# EAGLE board Parallel CS Prototype multiple sources (EAGLE 7.2.0)
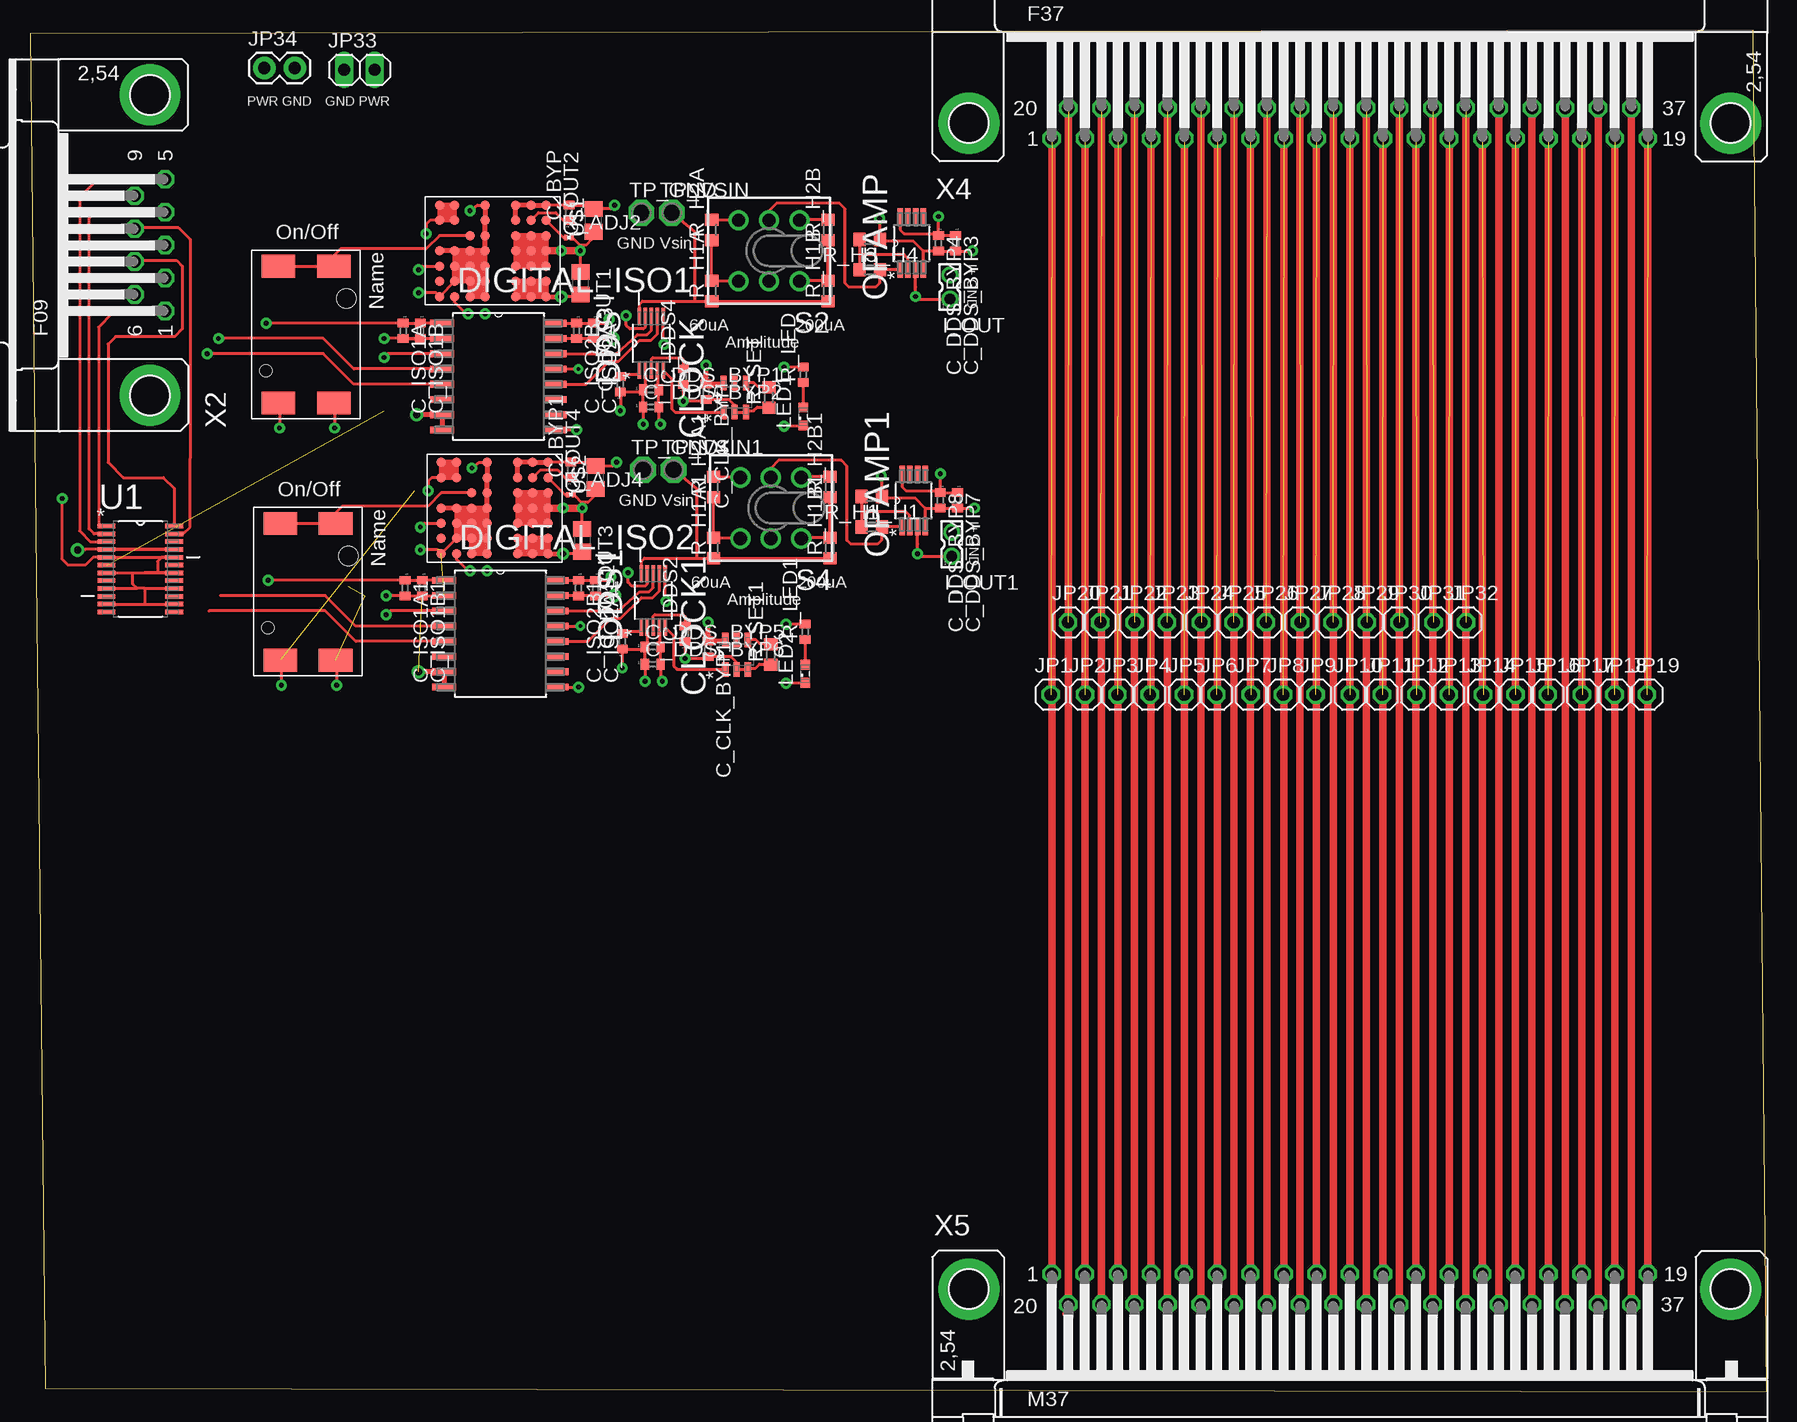
[diagram p0: board, top side]
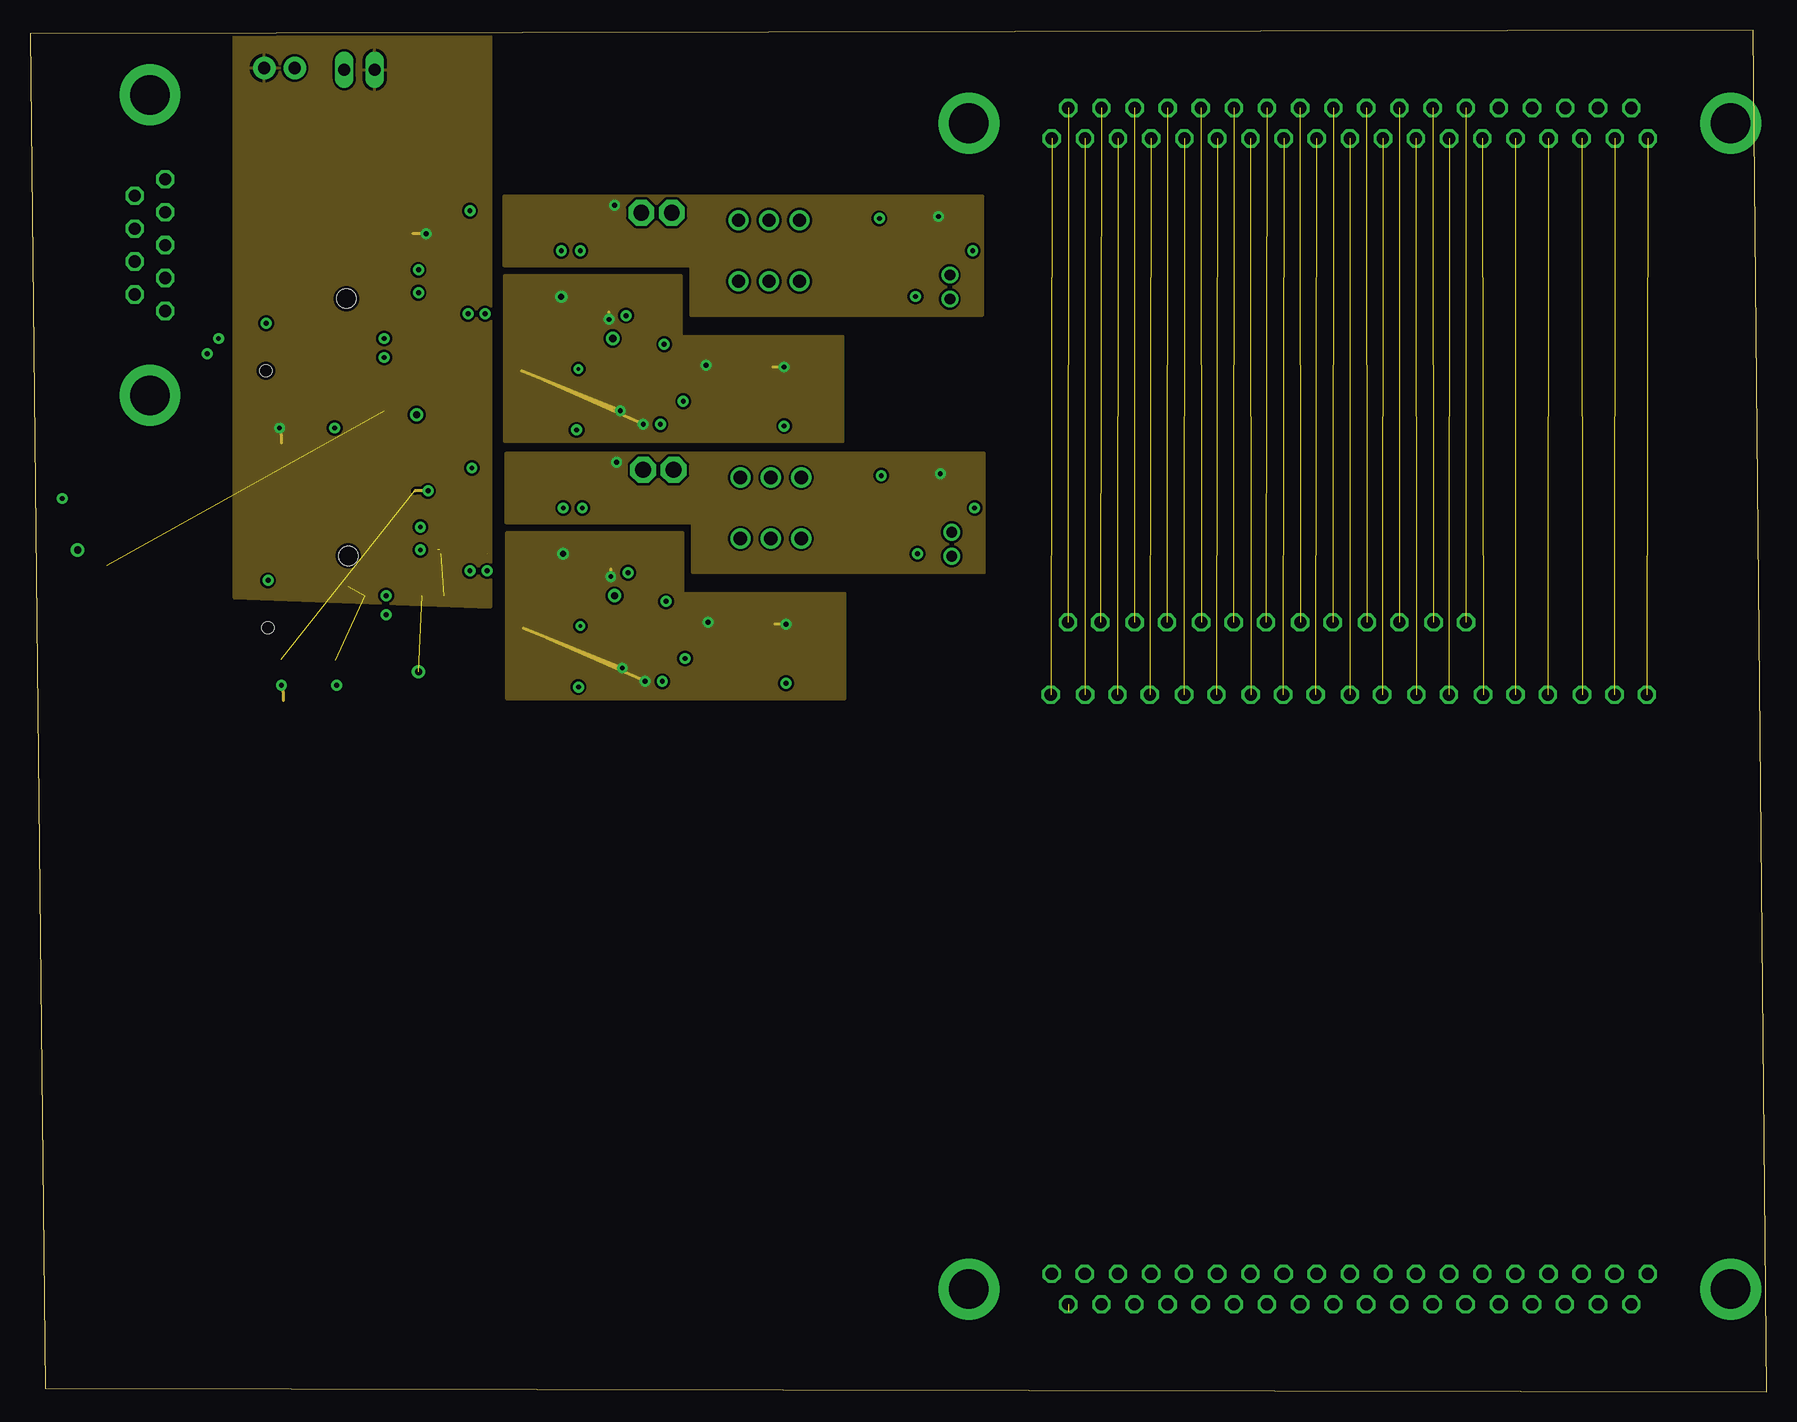
[diagram p1: board, inner layer Vdd]
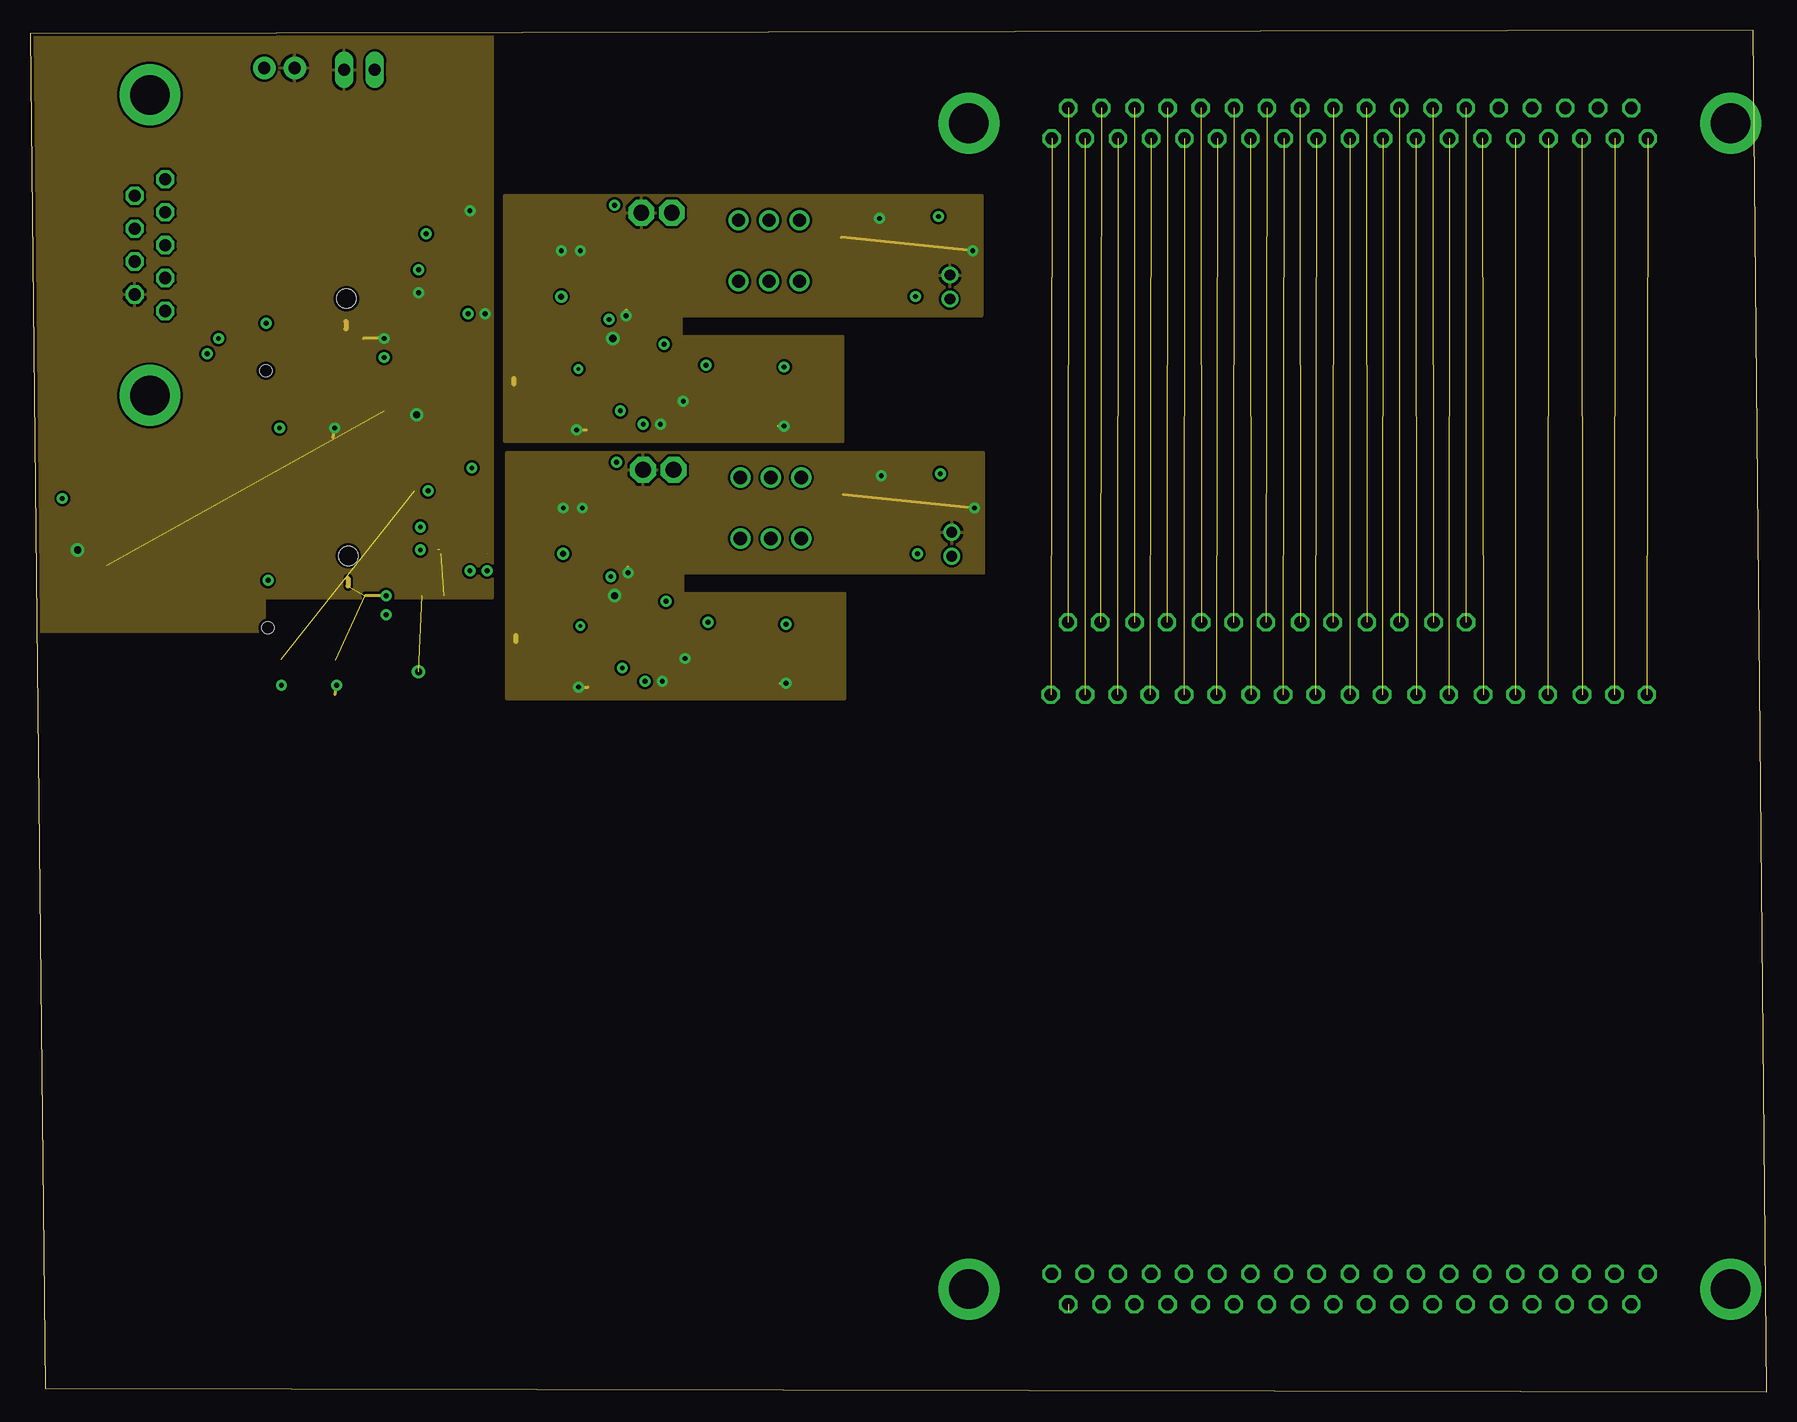
[diagram p2: board, inner layer Gnd]
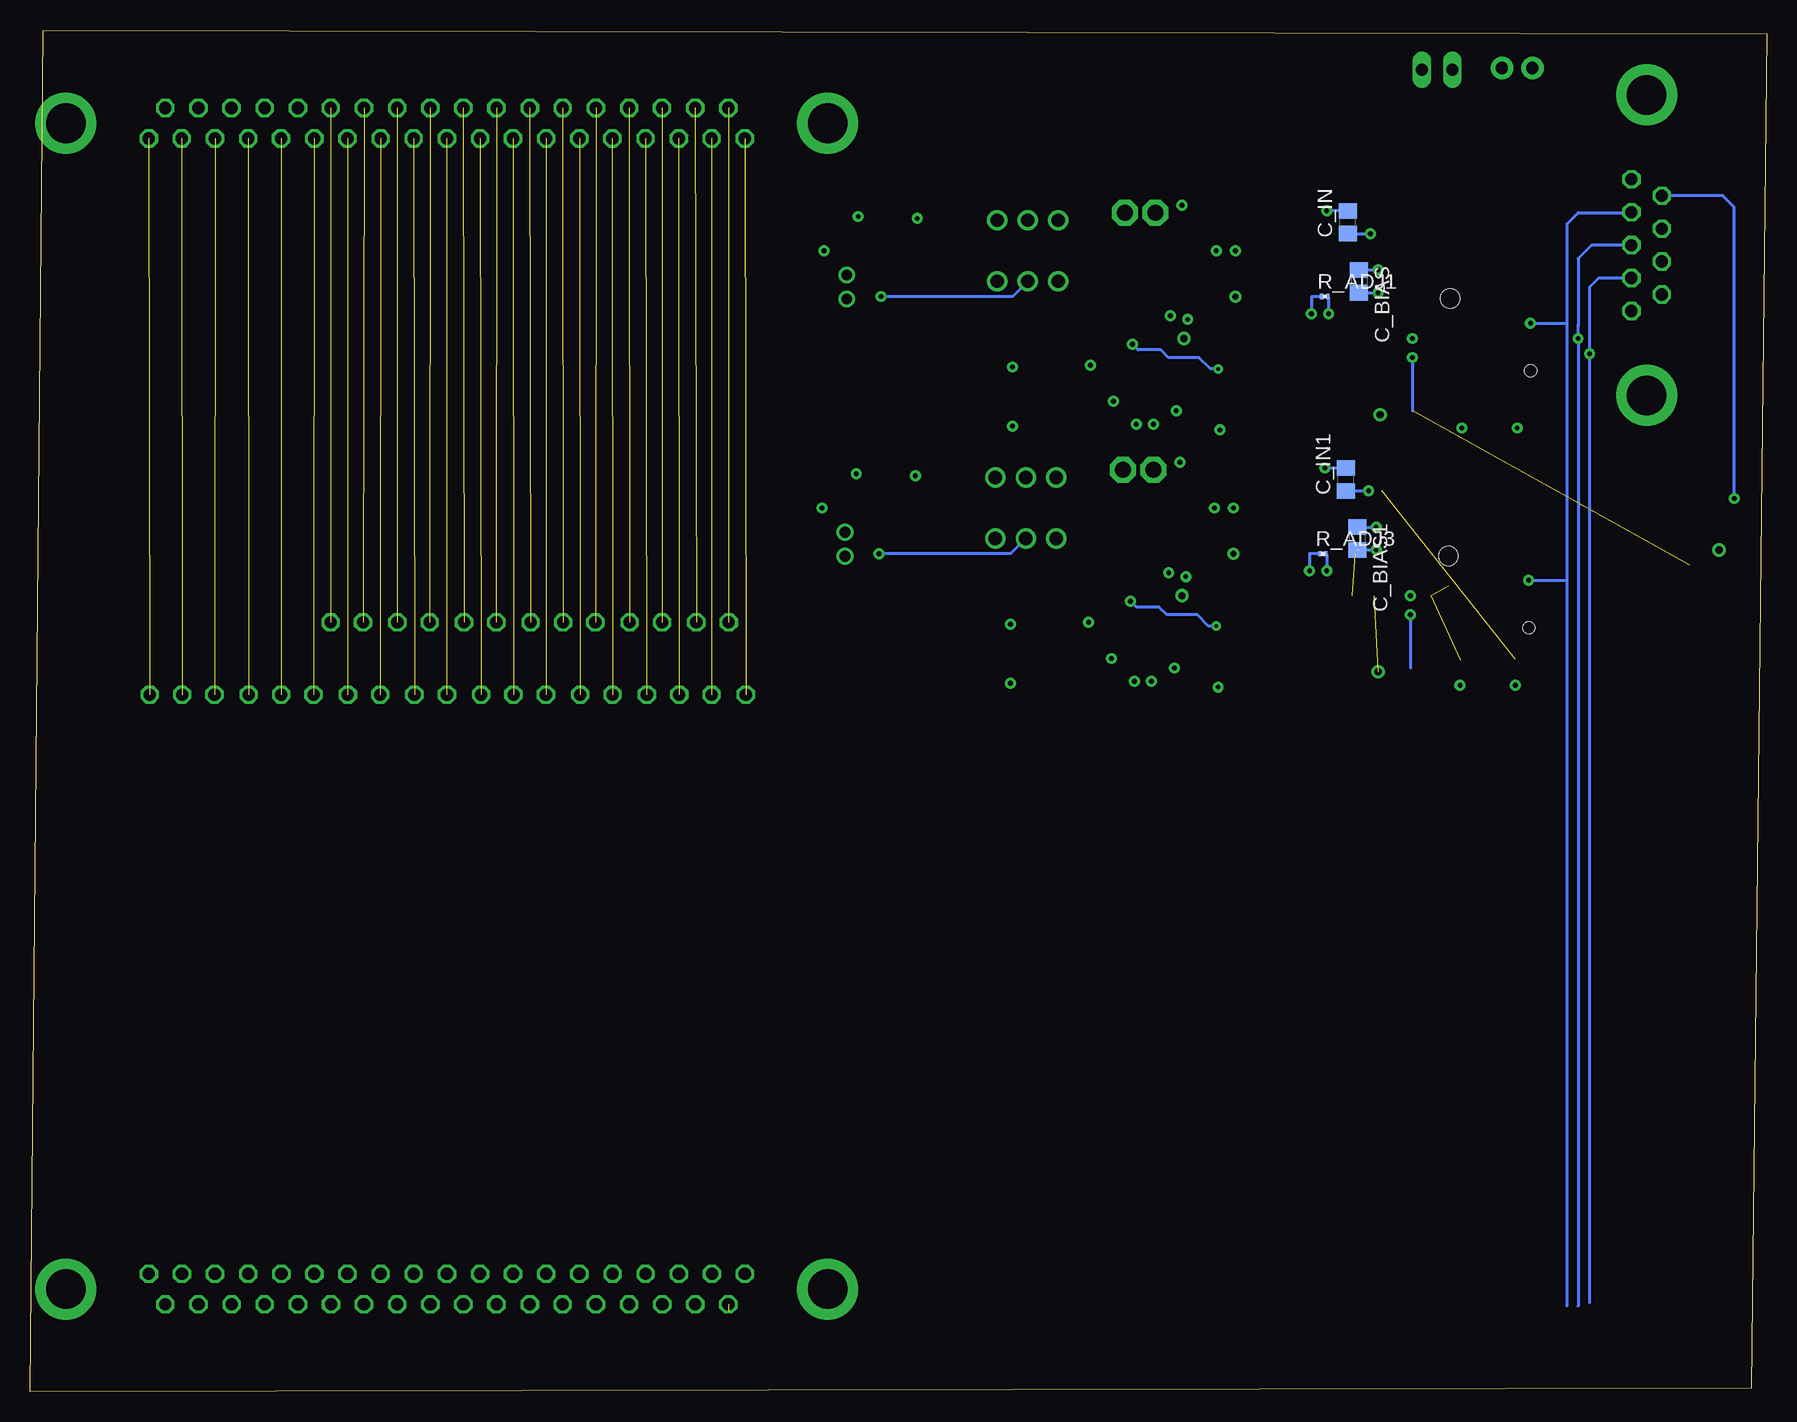
[diagram p3: board, bottom side, seen from below]

Size 144.76 x 113.49 mm. Coordinates in mm from the lower left corner, seen from the top.
Outline: 1.27,0.32 144.76,0 143.65,113.49 0,113.18 1.27,0.32
Copper layers (1*16): Top 0.035mm / dielectric 1.5mm / Bottom 0.035mm
Design rules "pcbtrain": minimum track width 0.2mm, minimum drill 0.4mm, track to track 0.2mm, track to pad 0.2mm, pad to pad 0.2mm, via to via 0.2mm, smd to smd 0mil, copper to edge 10mil, drill to drill 0.2mm, minimum pad ring 10mil, minimum via ring 10mil, stop-mask expansion 0.125mm, vias tented up to drill 0mil, thermal gap 10mil

## Footprints (pad centres in the part's own frame; a part is rotated, then mirrored left to right if it is on the bottom)
C0805 = smd 1.3 x 1.5: 1 -0.95,0; 2 0.95,0
C0402 = smd 0.7 x 0.9: 1 -0.65,0; 2 0.65,0
SOT95P280X100-6N = smd 1.219 x 0.508: 1 -1.219,0.94; 2 -1.219,0; 3 -1.219,-0.94; 4 1.219,-0.94; 5 1.219,0; 6 1.219,0.94
SOP50P490X110-10N = smd 1.422 x 0.305: 1 -2.235,0.991; 2 -2.235,0.508; 3 -2.235,0; 4 -2.235,-0.508; 5 -2.235,-0.991; 6 2.235,-0.991; 7 2.235,-0.508; 8 2.235,0; 9 2.235,0.508; 10 2.235,0.991
SOIC127P1032X265-16N = smd 1.981 x 0.559: 1 -4.699,4.445; 2 -4.699,3.175; 3 -4.699,1.905; 4 -4.699,0.635; 5 -4.699,-0.635; 6 -4.699,-1.905; 7 -4.699,-3.175; 8 -4.699,-4.445; 9 4.699,-4.445; 10 4.699,-3.175; 11 4.699,-1.905; 12 4.699,-0.635; 13 4.699,0.635; 14 4.699,1.905; 15 4.699,3.175; 16 4.699,4.445
R0603 = smd 1 x 1.1: 1 -0.85,0; 2 0.85,0
332-02 = drill 0.9 pad 1.27: 1 0,-1; 2 0,1
1X01 = drill 1.016 octagon: 1 0,0
1X02 = drill 1.016 long: 1 -1.27,0; 2 1.27,0
1X02' = drill 1.016 pad 1.88: 1 0,0; 2 2.54,0
LED_SML0603 = smd 0.8 x 0.8: A 0.75,0; C -0.75,0
SOP65P490X109-8N = smd 1.372 x 0.457: 1 -2.21,0.965; 2 -2.21,0.33; 3 -2.21,-0.33; 4 -2.21,-0.965; 5 2.21,-0.965; 6 2.21,-0.33; 7 2.21,0.33; 8 2.21,0.965
R0201 = smd 0.28 x 0.43: 1 -0.255,0; 2 0.255,0
R0402 = smd 0.7 x 0.9: 1 -0.65,0; 2 0.65,0
PVB4-EE = smd 1.9 x 2.8: 1 5.7,2.3; 2@1 -5.7,2.3; 2@2 -5.7,-2.3; 3 5.7,-2.3 | hole 1.6: -3,3.35 | hole 1: 3,-3.35
TL4XPO = drill 1.1 pad 1.676: 1 -2.54,2.54; 2 0,2.54; 3 2.54,2.54; 4 -2.54,-2.54; 5 0,-2.54; 6 2.54,-2.54
P1-13 = drill 1.321 pad 2.159 octagon: TP 0,0
SOP65P640X120-24N = smd 1.473 x 0.356: 1 -2.819,3.581; 2 -2.819,2.921; 3 -2.819,2.286; 4 -2.819,1.626; 5 -2.819,0.965; 6 -2.819,0.33; 7 -2.819,-0.33; 8 -2.819,-0.965; 9 -2.819,-1.626; 10 -2.819,-2.286; 11 -2.819,-2.921; 12 -2.819,-3.581; 13 2.819,-3.581; 14 2.819,-2.921; 15 2.819,-2.286; 16 2.819,-1.626; 17 2.819,-0.965; 18 2.819,-0.33; 19 2.819,0.33; 20 2.819,0.965; 21 2.819,1.626; 22 2.819,2.286; 23 2.819,2.921; 24 2.819,3.581
BGA-49 = smd 0.78 x 0.78: ADJ1 3.81,-3.175; ADJ2 -2.54,4.445; BIAS 1.27,-4.445; BYP -2.54,3.175; GND@1 -3.81,-0.635; GND@2 -2.54,-0.635; GND@3 -1.27,-0.635; GND@4 0,-0.635; GND@5 1.27,-0.635; GND@6 2.54,-0.635; GND@7 3.81,-0.635; GND@8 0,-1.905; GND@9 1.27,-1.905; GND@10 2.54,-1.905; GND@11 3.81,-1.905; GND@12 0,-3.175; GND@13 1.27,-3.175; GND@14 2.54,-3.175; GND@15 0,-4.445; GND@16 3.81,-4.445; RUN -1.27,-1.905; SS 2.54,-4.445; VIN@1 -3.81,-3.175; VIN@2 -2.54,-3.175; VIN@3 -3.81,-4.445; VIN@4 -2.54,-4.445; VOUT1@1 2.54,4.445; VOUT1@2 2.54,3.175; VOUT1@3 2.54,1.905; VOUT1@4 3.81,4.445; VOUT1@5 3.81,3.175; VOUT1@6 3.81,1.905; VOUT2@1 -3.81,4.445; VOUT2@2 -3.81,3.175; VOUT2@3 -3.81,1.905; VOUT2@4 -2.54,1.905; VOUT-@1 -1.27,4.445; VOUT-@2 -1.27,3.175; VOUT-@3 -1.27,1.905; VOUT-@4 0,4.445; VOUT-@5 0,3.175; VOUT-@6 0,1.905; VOUT-@7 1.27,4.445; VOUT-@8 1.27,3.175; VOUT-@9 1.27,1.905
F09HP = drill 1.016 octagon: 1 -5.486,-1.27; 2 -2.743,-1.27; 3 0,-1.27; 4 2.743,-1.27; 5 5.486,-1.27; 6 -4.115,1.27; 7 -1.372,1.27; 8 1.372,1.27; 9 4.115,1.27 | drill 3.302 pad 5.08: G1 -12.522,0; G2 12.522,0
F37HP = drill 1.016 octagon: 1 -24.841,-1.27; 2 -22.073,-1.27; 3 -19.329,-1.27; 4 -16.561,-1.27; 5 -13.792,-1.27; 6 -11.049,-1.27; 7 -8.28,-1.27; 8 -5.512,-1.27; 9 -2.769,-1.27; 10 0,-1.27; 11 2.769,-1.27; 12 5.512,-1.27; 13 8.28,-1.27; 14 11.049,-1.27; 15 13.818,-1.27; 16 16.561,-1.27; 17 19.329,-1.27; 18 22.098,-1.27; 19 24.841,-1.27; 20 -23.47,1.27; 21 -20.701,1.27; 22 -17.932,1.27; 23 -15.189,1.27; 24 -12.421,1.27; 25 -9.652,1.27; 26 -6.909,1.27; 27 -4.14,1.27; 28 -1.372,1.27; 29 1.372,1.27; 30 4.14,1.27; 31 6.909,1.27; 32 9.677,1.27; 33 12.421,1.27; 34 15.189,1.27; 35 17.958,1.27; 36 20.701,1.27; 37 23.47,1.27 | drill 3.302 pad 5.08: G1 -31.75,0; G2 31.75,0
M37HP = drill 1.016 octagon: 1 -24.841,1.27; 2 -22.098,1.27; 3 -19.329,1.27; 4 -16.561,1.27; 5 -13.818,1.27; 6 -11.049,1.27; 7 -8.28,1.27; 8 -5.512,1.27; 9 -2.769,1.27; 10 0,1.27; 11 2.769,1.27; 12 5.512,1.27; 13 8.28,1.27; 14 11.049,1.27; 15 13.792,1.27; 16 16.561,1.27; 17 19.329,1.27; 18 22.073,1.27; 19 24.841,1.27; 20 -23.47,-1.27; 21 -20.701,-1.27; 22 -17.958,-1.27; 23 -15.189,-1.27; 24 -12.421,-1.27; 25 -9.652,-1.27; 26 -6.909,-1.27; 27 -4.14,-1.27; 28 -1.372,-1.27; 29 1.372,-1.27; 30 4.14,-1.27; 31 6.909,-1.27; 32 9.652,-1.27; 33 12.421,-1.27; 34 15.189,-1.27; 35 17.932,-1.27; 36 20.701,-1.27; 37 23.47,-1.27 | drill 3.302 pad 5.08: G1 -31.75,0; G2 31.75,0

## Placement (x,y rotation side)
C_BIAS  4.7u  [C0805]  33.97,92.55 270 bottom
C_BIAS1  4.7u  [C0805]  34.13,71.12 270 bottom
C_BYP  10n  [C0402]  44.93,98.27 90 top
C_BYP1  10n  [C0402]  45.09,76.84 90 top
C_CLK_BYP  0.1u  [C0402]  56.36,83.34 270 top
C_CLK_BYP1  0.1u  [C0402]  56.52,61.91 270 top
C_DDS1  10n  [C0402]  49.37,62.55 90 top
C_DDS2  100n  [C0402]  54.61,63.18 90 top
C_DDS3  10n  [C0402]  49.21,83.98 90 top
C_DDS4  100n  [C0402]  54.45,84.61 90 top
C_DDS_BYP1  0.1u  [C0402]  51.75,83.5 0 top
C_DDS_BYP2  10u  [C0402]  51.75,82.07 0 top
C_DDS_BYP3  10u  [C0402]  77.15,95.73 270 top
C_DDS_BYP4  0.1u  [C0402]  75.72,95.73 270 top
C_DDS_BYP5  0.1u  [C0402]  51.91,62.07 0 top
C_DDS_BYP6  10u  [C0402]  51.91,60.64 0 top
C_DDS_BYP7  10u  [C0402]  77.31,74.3 270 top
C_DDS_BYP8  0.1u  [C0402]  75.88,74.3 270 top
C_IN  2.2u  [C0805]  34.92,97.47 90 bottom
C_IN1  2.2u  [C0805]  35.08,76.04 90 bottom
C_ISO1A  1u  [C0402]  31.12,88.42 270 top
C_ISO1A1  1u  [C0402]  31.27,66.99 270 top
C_ISO1B  0.1u  [C0402]  32.54,88.42 270 top
C_ISO1B1  0.1u  [C0402]  32.7,66.99 270 top
C_ISO2A  1u  [C0402]  46.99,88.42 270 top
C_ISO2A1  1u  [C0402]  47.15,66.99 270 top
C_ISO2B  0.1u  [C0402]  45.56,88.42 270 top
C_ISO2B1  0.1u  [C0402]  45.72,66.99 270 top
C_OUT1  47u  [C0805]  45.88,92.39 270 top
C_OUT2  10u  [C0805]  46.99,97.63 90 top
C_OUT3  47u  [C0805]  46.04,70.96 270 top
C_OUT4  10u  [C0805]  47.15,76.2 90 top
CLOCK  LTC69000  [SOT95P280X100-6N]  58.74,82.87 90 top
CLOCK1  LTC69000  [SOT95P280X100-6N]  58.9,61.44 90 top
DDS  AD9833BRMZ  [SOP50P490X110-10N]  51.79,87.39 90 top
DDS1  AD9833BRMZ  [SOP50P490X110-10N]  51.95,65.96 90 top
DIGITAL_ISO1  ADUM1410ARWZ  [SOIC127P1032X265-16N]  39.05,84.61 0 top
DIGITAL_ISO2  ADUM1410ARWZ  [SOIC127P1032X265-16N]  39.21,63.18 0 top
H_H1  10k  [R0603]  70.17,72.07 0 top
H_H4  10k  [R0603]  70.01,93.5 0 top
I_OUT  332-02  [332-02]  76.68,92.08 0 top
I_OUT1  332-02  [332-02]  76.84,70.64 0 top
JP1  [1X01]  85.09,58.1 0 top
JP2  [1X01]  87.95,58.1 0 top
JP3  [1X01]  90.65,58.1 0 top
JP4  [1X01]  93.34,58.1 0 top
JP5  [1X01]  96.2,58.1 0 top
JP6  [1X01]  98.9,58.1 0 top
JP7  [1X01]  101.76,58.1 0 top
JP8  [1X01]  104.46,58.1 0 top
JP9  [1X01]  107.16,58.1 0 top
JP10  [1X01]  110.01,58.1 0 top
JP11  [1X01]  112.71,58.1 0 top
JP12  [1X01]  115.57,58.1 0 top
JP13  [1X01]  118.27,58.1 0 top
JP14  [1X01]  121.13,58.1 0 top
JP15  [1X01]  123.83,58.1 0 top
JP16  [1X01]  126.52,58.1 0 top
JP17  [1X01]  129.38,58.1 0 top
JP18  [1X01]  132.08,58.1 0 top
JP19  [1X01]  134.78,58.1 0 top
JP20  [1X01]  86.52,64.14 0 top
JP21  [1X01]  89.22,64.14 0 top
JP22  [1X01]  92.08,64.14 0 top
JP23  [1X01]  94.77,64.14 0 top
JP24  [1X01]  97.63,64.14 0 top
JP25  [1X01]  100.33,64.14 0 top
JP26  [1X01]  103.03,64.14 0 top
JP27  [1X01]  105.89,64.14 0 top
JP28  [1X01]  108.59,64.14 0 top
JP29  [1X01]  111.44,64.14 0 top
JP30  [1X01]  114.14,64.14 0 top
JP31  [1X01]  117,64.14 0 top
JP32  [1X01]  119.7,64.14 0 top
JP33  PWR  [1X02]  27.46,110.17 0 top
JP34  [1X02']  19.53,110.33 0 top
LED1  [LED_SML0603]  64.45,81.28 90 top
LED2  [LED_SML0603]  64.61,59.85 90 top
OPAMP  LMC6482IMM  [SOP65P490X109-8N]  73.5,95.73 90 top
OPAMP1  LMC6482IMM  [SOP65P490X109-8N]  73.66,74.3 90 top
R_ADJ1  6.8k  [R0201]  36.83,91.28 0 bottom
R_ADJ2  300k  [R0201]  44.93,96.2 0 top
R_ADJ3  6.8k  [R0201]  36.99,69.85 0 bottom
R_ADJ4  300k  [R0201]  45.09,74.77 0 top
R_H1  10k  [R0603]  70.17,74.61 180 top
R_H1A  10k  [R0603]  56.83,91.76 90 top
R_H1A1  10k  [R0603]  56.99,70.33 90 top
R_H1B  3.3k  [R0603]  66.52,91.76 90 top
R_H1B1  3.3k  [R0603]  66.68,70.33 90 top
R_H2A  10k  [R0603]  56.83,96.84 90 top
R_H2A1  10k  [R0603]  56.99,75.41 90 top
R_H2B  3.3k  [R0603]  66.52,96.84 90 top
R_H2B1  3.3k  [R0603]  66.68,75.41 90 top
R_H3  10k  [R0603]  70.01,96.04 180 top
R_LED  2700  [R0402]  64.45,84.77 90 top
R_LED1  2700  [R0402]  64.61,63.34 90 top
R_SET  20k  [R0603]  61.59,82.87 90 top
R_SET1  20k  [R0603]  61.75,61.44 90 top
S1  TL36POPVB4  [PVB4-EE]  23.02,88.11 270 top
S2  TL46WOMULTICOMP_2MD  [TL4XPO]  61.59,95.09 180 top
S3  TL36POPVB4  [PVB4-EE]  23.18,66.68 270 top
S4  TL46WOMULTICOMP_2MD  [TL4XPO]  61.75,73.66 180 top
TP_GND  PTR1PAD1-13  [P1-13]  50.96,98.27 0 top
TP_GND1  PTR1PAD1-13  [P1-13]  51.12,76.84 0 top
TP_VSIN  PTR1PAD1-13  [P1-13]  53.5,98.27 0 top
TP_VSIN1  PTR1PAD1-13  [P1-13]  53.66,76.84 0 top
U1  ADG714BRUZ  [SOP65P640X120-24N]  9.21,68.58 0 top
U$1  LTM8048  [BGA-49]  38.58,95.09 270 top
U$2  LTM8048  [BGA-49]  38.73,73.66 270 top
X2  CTR_ARD  [F09HP]  10,95.57 90 top
X4  DSUB _T  [F37HP]  110.01,105.73 0 top
X5  DSUB_B  [M37HP]  110.01,8.57 0 top

## Library data of the parts
C_BIAS C_BIAS1 C_BYP C_BYP1 C_CLK_BYP C_CLK_BYP1 C_DDS1-C_DDS4 C_DDS_BYP1-C_DDS_BYP8 C_IN C_IN1 C_ISO1A C_ISO1A1 C_ISO1B C_ISO1B1 C_ISO2A C_ISO2A1 C_ISO2B C_ISO2B1 C_OUT1-C_OUT4 H_H1 H_H4 R_ADJ1-R_ADJ4 R_H1 R_H1A R_H1A1 R_H1B R_H1B1 R_H2A R_H2A1 R_H2B R_H2B1 R_H3 R_LED R_LED1 R_SET R_SET1 = resistor
CLOCK CLOCK1 = LTC6900; MPN: LTC6906IS6#PBF; OC_FARNELL: 1432109; OC_NEWARK: 10R6975; PACKAGE: TSOT-23-6; SUPPLIER: Linear Technology
DDS DDS1 = ad9833; MPN: AD9833BRMZ; OC_FARNELL: 1581966; OC_NEWARK: 19M1014; PACKAGE: MSOP-10; SUPPLIER: Analog Devices
DIGITAL_ISO1 DIGITAL_ISO2 = SwitchBoard; MPN: ADUM1410ARWZ; OC_FARNELL: 2067770; OC_NEWARK: 73T8174; PACKAGE: 16-Lead SOIC_W; SUPPLIER: Analog Devices
I_OUT I_OUT1 = con-garry
JP1-JP32 JP34 = SwitchBoard
JP33 = pinhead
LED1 LED2 = eagle-ltspice; SPICEMODEL: NONE; SPICEPREFIX: D; SPICETYPE: diode
OPAMP OPAMP1 = LMC6482; MPN: LMC6482IMM; OC_FARNELL: 1468890; OC_NEWARK: 83F3826; PACKAGE: MSOP-8; SUPPLIER: NationalSemiconductor
S1-S4 = switch
TP_GND TP_GND1 TP_VSIN TP_VSIN1 = testpad
U1 = SwitchBoard; MPN: ADG714BRUZ; OC_FARNELL: 9604367; OC_NEWARK: 59K1531; PACKAGE: TSSOP-24; SUPPLIER: Analog Devices
U$1 U$2 = LTM8048
X2 X4 X5 = con-subd; OC_FARNELL: unknown; OC_NEWARK: unknown

## Nets
ARD_5V: C_ISO1A.1 C_ISO1B.1 DIGITAL_ISO1.1 U1.2 X2.4
ARD_5V1: C_ISO1A1.1 C_ISO1B1.1 DIGITAL_ISO2.1
CLK_OUT: CLOCK.1 DDS.5
CLK_OUT1: CLOCK1.1 DDS1.5
COMP: C_DDS3.2 DDS.1
COMP1: C_DDS1.2 DDS1.1
FSYNC: DDS.8 DIGITAL_ISO1.14
FSYNC1: DDS1.8 DIGITAL_ISO2.14
FSYNC_ARD: U1.5 U1.7 U1.9 U1.11 U1.14 U1.16 U1.18 U1.20 X2.9
FSYNC_IN: DIGITAL_ISO1.3 U1.6
FSYNC_IN1: DIGITAL_ISO2.3
GND: C_BIAS.2 C_IN.2 C_ISO1A.2 C_ISO1B.2 DIGITAL_ISO1.2 DIGITAL_ISO1.7 DIGITAL_ISO1.8 JP33.1 JP34.2 R_ADJ1.1 S1.1 U1.4 U1.21 U$1.GND@1 U$1.GND@2 U$1.GND@3 U$1.GND@4 U$1.GND@5 U$1.GND@6 U$1.GND@7 U$1.GND@8 U$1.GND@9 U$1.GND@10 U$1.GND@11 U$1.GND@12 U$1.GND@13 U$1.GND@14 U$1.GND@15 U$1.GND@16 X2.6
GND1: C_BIAS1.2 C_IN1.2 C_ISO1A1.2 C_ISO1B1.2 DIGITAL_ISO2.2 DIGITAL_ISO2.7 DIGITAL_ISO2.8 R_ADJ3.1 S3.1 U$2.GND@1 U$2.GND@2 U$2.GND@3 U$2.GND@4 U$2.GND@5 U$2.GND@6 U$2.GND@7 U$2.GND@8 U$2.GND@9 U$2.GND@10 U$2.GND@11 U$2.GND@12 U$2.GND@13 U$2.GND@14 U$2.GND@15 U$2.GND@16
GND_CS: C_CLK_BYP.2 C_DDS4.1 C_DDS_BYP1.2 C_DDS_BYP2.2 C_DDS_BYP3.2 C_DDS_BYP4.2 C_ISO2A.2 C_ISO2B.2 C_OUT1.1 C_OUT2.1 CLOCK.2 CLOCK.3 DDS.4 DDS.9 DIGITAL_ISO1.9 DIGITAL_ISO1.15 I_OUT.2 LED1.C OPAMP.4 R_ADJ2.2 R_H3.1 R_SET.1 TP_GND.TP U$1.VOUT-@1 U$1.VOUT-@2 U$1.VOUT-@3 U$1.VOUT-@4 U$1.VOUT-@5 U$1.VOUT-@6 U$1.VOUT-@7 U$1.VOUT-@8 U$1.VOUT-@9
GND_CS1: C_CLK_BYP1.2 C_DDS2.1 C_DDS_BYP5.2 C_DDS_BYP6.2 C_DDS_BYP7.2 C_DDS_BYP8.2 C_ISO2A1.2 C_ISO2B1.2 C_OUT3.1 C_OUT4.1 CLOCK1.2 CLOCK1.3 DDS1.4 DDS1.9 DIGITAL_ISO2.9 DIGITAL_ISO2.15 I_OUT1.2 LED2.C OPAMP1.4 R_ADJ4.2 R_H1.1 R_SET1.1 TP_GND1.TP U$2.VOUT-@1 U$2.VOUT-@2 U$2.VOUT-@3 U$2.VOUT-@4 U$2.VOUT-@5 U$2.VOUT-@6 U$2.VOUT-@7 U$2.VOUT-@8 U$2.VOUT-@9
IOUT: I_OUT.1 OPAMP.3 S2.2
IOUT1: I_OUT1.1 OPAMP1.3 S4.2
N$1: C_DDS4.2 DDS.3
N$2: C_BYP.1 U$1.BYP
N$3: S1.2@1 S1.2@2 U$1.RUN
N$6: LED1.A R_LED.1
N$7: R_H2A.2 S2.6
N$8: CLOCK.4 R_SET.2
N$9: R_H2B.2 S2.4
N$10: C_BIAS.1 U$1.BIAS
N$11: R_ADJ1.2 U$1.ADJ1
N$12: R_H1B.2 R_H2B.1 S2.1
N$13: R_ADJ2.1 U$1.ADJ2
N$15: R_H1A.2 R_H2A.1 S2.3
N$16: C_BIAS1.1 U$2.BIAS
N$17: R_ADJ3.2 U$2.ADJ1
N$18: R_ADJ4.1 U$2.ADJ2
N$19: C_BYP1.1 U$2.BYP
N$20: C_DDS2.2 DDS1.3
N$21: CLOCK1.4 R_SET1.2
N$22: R_H1B1.2 R_H2B1.1 S4.1
N$23: S3.2@1 S3.2@2 U$2.RUN
N$24: LED2.A R_LED1.1
N$25: R_H2A1.2 S4.6
N$26: R_H1A1.2 R_H2A1.1 S4.3
N$27: R_H2B1.2 S4.4
NEGA: H_H4.1 OPAMP.2 R_H3.2
NEGA1: H_H1.1 OPAMP1.2 R_H1.2
OP_OUTA: H_H4.2 OPAMP.1 S2.5
OP_OUTA1: H_H1.2 OPAMP1.1 S4.5
OUT_1: JP1.1 X4.1 X5.1
OUT_2: JP2.1 X4.2 X5.2
OUT_3: JP3.1 X4.3 X5.3
OUT_4: JP4.1 X4.4 X5.4
OUT_5: JP5.1 X4.5 X5.5
OUT_6: JP6.1 X4.6 X5.6
OUT_7: JP7.1 X4.7 X5.7
OUT_8: JP8.1 X4.8 X5.8
OUT_9: JP9.1 X4.9 X5.9
OUT_10: JP10.1 X4.10 X5.10
OUT_11: JP11.1 X4.11 X5.11
OUT_12: JP12.1 X4.12 X5.12
OUT_13: JP13.1 X4.13 X5.13
OUT_14: JP14.1 X4.14 X5.14
OUT_15: JP15.1 X4.15 X5.15
OUT_16: JP16.1 X4.16 X5.16
OUT_17: JP17.1 X4.17 X5.17
OUT_18: JP18.1 X4.18 X5.18
OUT_19: JP19.1 X4.19 X5.19
OUT_20: JP20.1 X4.20 X5.20
OUT_21: JP21.1 X4.21 X5.21
OUT_22: JP22.1 X4.22 X5.22
OUT_23: JP23.1 X4.23 X5.23
OUT_24: JP24.1 X4.24 X5.24
OUT_25: JP25.1 X4.25 X5.25
OUT_26: JP26.1 X4.26 X5.26
OUT_27: JP27.1 X4.27 X5.27
OUT_28: JP28.1 X4.28 X5.28
OUT_29: JP29.1 X4.29 X5.29
OUT_30: JP30.1 X4.30 X5.30
OUT_31: JP31.1 X4.31 X5.31
OUT_32: JP32.1 X4.32 X5.32
OUT_33: X4.33 X5.33
OUT_34: X4.34 X5.34
OUT_35: X4.35 X5.35
OUT_36: X4.36 X5.36
OUT_37: X4.37 X5.37
SCLK: DDS.7 DIGITAL_ISO1.12
SCLK1: DDS1.7 DIGITAL_ISO2.12
SCLK_IN: DIGITAL_ISO1.5 X2.2
SCLK_IN1: DIGITAL_ISO2.5
SDATA: DDS.6 DIGITAL_ISO1.13
SDATA1: DDS1.6 DIGITAL_ISO2.13
SDATA_IN: DIGITAL_ISO1.4 X2.3
SDATA_IN1: DIGITAL_ISO2.4
SW_DIN: U1.3 X2.5
SW_SCLK: U1.1 X2.1
SW_~RESET: U1.23 X2.8
SW_~SYNC: U1.24 X2.7
V_SINE: DDS.10 R_H1A.1 R_H1B.1 TP_VSIN.TP
V_SINE1: DDS1.10 R_H1A1.1 R_H1B1.1 TP_VSIN1.TP
VDD: C_IN.1 JP33.2 JP34.1 S1.3 U$1.VIN@1 U$1.VIN@2 U$1.VIN@3 U$1.VIN@4
VDD1: C_IN1.1 S3.3 U$2.VIN@1 U$2.VIN@2 U$2.VIN@3 U$2.VIN@4
VDD_CS_ANA: C_BYP.2 C_DDS_BYP3.1 C_DDS_BYP4.1 C_OUT2.2 OPAMP.8 U$1.VOUT2@1 U$1.VOUT2@2 U$1.VOUT2@3 U$1.VOUT2@4
VDD_CS_ANA1: C_BYP1.2 C_DDS_BYP7.1 C_DDS_BYP8.1 C_OUT4.2 OPAMP1.8 U$2.VOUT2@1 U$2.VOUT2@2 U$2.VOUT2@3 U$2.VOUT2@4
VDD_CS_DIG: C_CLK_BYP.1 C_DDS3.1 C_DDS_BYP1.1 C_DDS_BYP2.1 C_ISO2A.1 C_ISO2B.1 C_OUT1.2 CLOCK.6 DDS.2 DIGITAL_ISO1.16 R_LED.2 U$1.VOUT1@1 U$1.VOUT1@2 U$1.VOUT1@3 U$1.VOUT1@4 U$1.VOUT1@5 U$1.VOUT1@6
VDD_CS_DIG1: C_CLK_BYP1.1 C_DDS1.1 C_DDS_BYP5.1 C_DDS_BYP6.1 C_ISO2A1.1 C_ISO2B1.1 C_OUT3.2 CLOCK1.6 DDS1.2 DIGITAL_ISO2.16 R_LED1.2 U$2.VOUT1@1 U$2.VOUT1@2 U$2.VOUT1@3 U$2.VOUT1@4 U$2.VOUT1@5 U$2.VOUT1@6

## Tracks (layer width: path | path; a pad name or v marks a point on that pad's centre or on a via)
ARD_5V  (via drill 0.4 pad 0.25)
  Top 0.254: U1.2 5.33,71.5 4.92,71.91 4.92,97.79 5.4,98.27 11.23,98.27 X2.4 | DIGITAL_ISO1.1 32.56,89.06 C_ISO1B.1 C_ISO1A.1 31.1,89.06 v19.69,89.06
  Bottom 0.254: 16.67,89.06 16.67,97.31 15.72,98.27 11.32,98.27 X2.4 | 16.67,89.06 16.67,7.14 | v19.69,89.06 16.67,89.06
ARD_5V1  (via drill 0.4 pad 0.25)
  Top 0.254: DIGITAL_ISO2.1 32.72,67.63 C_ISO1B1.1 C_ISO1A1.1 31.26,67.63 v19.84,67.63
  Bottom 0.254: v19.84,67.63 16.83,67.63
CLK_OUT
  Top 0.254: DDS.5 53.5,84.44 53.5,81.92 53.77,81.65 CLOCK.1
CLK_OUT1
  Top 0.254: DDS1.5 53.66,63.01 53.66,60.48 53.92,60.22 CLOCK1.1
COMP
  Top 0.254: 49.21,84.77 C_DDS3.2 49.36,84.77 50.8,84.77 DDS.1
COMP1
  Top 0.254: 49.37,63.34 C_DDS1.2 49.51,63.34 50.96,63.34 DDS1.1
FSYNC
  Top 0.254: DIGITAL_ISO1.14 48.9,86.52 50.64,88.11 51.44,88.11 51.79,88.46 DDS.8
FSYNC1
  Top 0.254: DIGITAL_ISO2.14 49.05,65.09 50.8,66.68 51.59,66.68 51.95,67.03 DDS1.8
FSYNC_ARD  (via drill 0.4 pad 0.25)
  Top 0.254: 8.57,68.25 10.64,68.25 | 10.64,68.25 U1.18 9.54,68.25 9.53,68.26 | U1.9 8.93,66.95 | 9.53,66.95 U1.16 | U1.11 9.59,65.66 | 9.59,65.66 U1.14 | U1.7 8.57,68.25 | 10.64,68.25 10.64,69.22 10.97,69.55 U1.20 U1.5 5.25,69.55 4.6,68.9 3.18,68.9 2.7,69.37 v2.7,74.45 | 9.59,65.66 9.59,66.89 9.53,66.95 | 9.53,66.95 8.93,66.95 | 8.93,66.95 8.57,67.31 8.57,68.25 | 8.72,99.7 X2.9
  Bottom 0.254: v2.7,74.45 2.7,98.74 3.64,99.68 X2.9
FSYNC_IN  (via drill 0.4 pad 0.25)  (1 unrouted)
  Top 0.254: DIGITAL_ISO1.3 29.85,86.52 v29.53,86.2
  Bottom 0.254: v29.53,86.2 29.53,81.76
FSYNC_IN1  (via drill 0.4 pad 0.25)
  Top 0.254: DIGITAL_ISO2.3 30,65.09 v29.69,64.77
  Bottom 0.254: v29.69,64.77 29.69,60.33
GND  (via drill 0.4 pad 0.25, 0.6)
  Top 0.254: U1.4 U1.21 4.64,70.21 v3.97,70.17 | v36.67,98.43 37.31,98.9 U$1.GND@1 | U$1.GND@14 U$1.GND@16 33.81,91.6 32.54,91.6 | S1.1 25.4,82.17 v25.4,80.33 | C_ISO1A.2 31.1,87.79 v29.53,87.79 | C_ISO1A.2 C_ISO1B.2 | C_ISO1A.2 31.13,87.79 DIGITAL_ISO1.2
  Top 0.406: U$1.GND@7 U$1.GND@11 U$1.GND@10 | U$1.GND@10 U$1.GND@6 U$1.GND@7 | U$1.GND@7 U$1.GND@5 | U$1.GND@5 U$1.GND@4 | U$1.GND@4 U$1.GND@8 | U$1.GND@8 U$1.GND@12 | U$1.GND@12 U$1.GND@15 | U$1.GND@12 U$1.GND@13 | U$1.GND@10 U$1.GND@14 U$1.GND@13 | U$1.GND@10 U$1.GND@9 | U$1.GND@9 U$1.GND@8 | U$1.GND@9 U$1.GND@13 | U$1.GND@4 U$1.GND@3 U$1.GND@2 U$1.GND@1 | 34.34,87.77 DIGITAL_ISO1.2 | v32.23,81.44 DIGITAL_ISO1.7 DIGITAL_ISO1.8 | U$1.GND@9 U$1.GND@5
  Gnd 0.254: v29.53,87.79 27.78,87.79 | v37.94,89.85 37.94,89.54 | v32.38,91.6 32.07,91.6 | v25.4,80.33 25.24,79.53
  Gnd 0.406: 26.35,89.22 26.35,88.58
  Bottom 0.254: C_IN.2 v36.67,98.43 | R_ADJ1.1 U$1.GND@7 v37.94,89.85 | C_BIAS.2 v32.38,91.6
  pour Gnd: 38.58,113.98 16.99,113.98 18.1,66.2 38.58,66.2
  pour Gnd: 19.53,63.34 -6.98,63.34 -6.98,64.14 -6.03,64.14 -6.03,115.09 19.84,115.09 19.84,114.3 19.53,114.3
GND1  (via drill 0.4 pad 0.25, 0.6)  (6 unrouted)
  Top 0.254: v36.83,76.99 37.47,77.47 U$2.GND@1 | U$2.GND@14 U$2.GND@16 33.97,70.17 32.7,70.17 | S3.1 25.56,60.74 v25.56,58.9 | C_ISO1A1.2 31.26,66.36 v29.69,66.36 | C_ISO1A1.2 C_ISO1B1.2 | C_ISO1A1.2 31.29,66.36 DIGITAL_ISO2.2
  Top 0.406: U$2.GND@7 U$2.GND@11 U$2.GND@10 | U$2.GND@10 U$2.GND@6 U$2.GND@7 | U$2.GND@7 U$2.GND@5 | U$2.GND@5 U$2.GND@4 | U$2.GND@4 U$2.GND@8 | U$2.GND@8 U$2.GND@12 | U$2.GND@12 U$2.GND@15 | U$2.GND@12 U$2.GND@13 | U$2.GND@10 U$2.GND@14 U$2.GND@13 | U$2.GND@10 U$2.GND@9 | U$2.GND@9 U$2.GND@8 | U$2.GND@9 U$2.GND@13 | U$2.GND@4 U$2.GND@3 U$2.GND@2 U$2.GND@1 | 34.5,66.34 DIGITAL_ISO2.2 | v32.38,60.01 DIGITAL_ISO2.7 DIGITAL_ISO2.8 | U$2.GND@9 U$2.GND@5
  Gnd 0.254: v29.69,66.36 27.94,66.36 | v38.1,68.42 38.1,68.1 | v32.54,70.17 32.23,70.17 | v25.56,58.9 25.4,58.1
  Gnd 0.406: 26.51,67.79 26.51,67.15
  Bottom 0.254: C_IN1.2 v36.83,76.99 | R_ADJ3.1 U$2.GND@7 v38.1,68.42 | C_BIAS1.2 v32.54,70.17
GND_CS  (via drill 0.4, 0.4 pad 0.25, 0.6)
  Top 0.254: 45.88,93.03 C_OUT1.1 v45.88,95.09 | R_SET.1 61.54,82.07 60.64,82.07 60.33,81.76 59.79,81.76 CLOCK.3 CLOCK.2 58.74,82.23 58.28,82.69 C_CLK_BYP.2 56.21,82.55 v54.45,82.55 C_DDS4.1 | DDS.4 52.3,83.61 C_DDS_BYP1.2 C_DDS_BYP2.2 52.4,80.79 v52.55,80.65 | v78.58,95.09 78.25,95.08 C_DDS_BYP3.2 C_DDS_BYP4.2 75.71,95.09 74.45,95.09 | OPAMP.4 74.47,95.08 74.45,95.09 | 74.45,95.09 73.66,95.89 71.02,95.89 R_H3.1 | C_OUT2.1 46.83,96.04 46.35,95.57 45.88,95.57 v45.88,95.09 | 44.45,80.17 v45.56,80.17 | DDS.9 51.28,89.62 51.28,88.74 51.12,88.58 50.01,88.58 49.69,88.9 v49.69,89.69 | LED1.C 64.41,80.49 v62.87,80.49 | v48.58,87.79 48.56,87.77 C_ISO2A.2 C_ISO2B.2 44.31,87.77 | R_ADJ2.2 45.88,95.51 v45.88,95.09
  Top 0.406: U$1.VOUT-@2 U$1.VOUT-@1 U$1.VOUT-@4 | U$1.VOUT-@2 U$1.VOUT-@3 U$1.VOUT-@6 | U$1.VOUT-@6 U$1.VOUT-@9 U$1.VOUT-@8 U$1.VOUT-@7 U$1.VOUT-@4 | U$1.VOUT-@4 U$1.VOUT-@5 | U$1.VOUT-@6 U$1.VOUT-@5 | U$1.VOUT-@5 U$1.VOUT-@2 | DIGITAL_ISO1.9 44.45,80.17 | 44.31,87.77 44.29,87.79 DIGITAL_ISO1.15 | C_ISO2A.2 47.29,87.77
  Top 0.61: U$1.VOUT-@4 v44.29,95.09 v45.88,95.09
  Gnd 0.254: v78.58,95.09 67.63,96.2 | v45.56,80.17 46.35,80.17 | v49.69,89.69 49.69,90.17 | v62.87,80.49 62.39,80.49
  Gnd 0.406: 40.32,84.46 40.32,83.98
  other vias: 70.8,97.79
  pour Gnd: 39.53,99.7 39.53,79.22 67.79,79.22 67.79,87.95 54.29,87.95 54.29,89.69 79.38,89.69 79.38,99.7
GND_CS1  (via drill 0.4, 0.4 pad 0.25, 0.6)
  Top 0.254: 46.04,71.59 C_OUT3.1 v46.04,73.66 | R_SET1.1 61.7,60.64 60.8,60.64 60.48,60.33 59.94,60.33 CLOCK1.3 CLOCK1.2 58.9,60.8 58.44,61.26 C_CLK_BYP1.2 56.37,61.12 v54.61,61.12 C_DDS2.1 | DDS1.4 52.46,62.17 C_DDS_BYP5.2 C_DDS_BYP6.2 52.56,59.36 v52.7,59.21 | v78.74,73.66 78.41,73.65 C_DDS_BYP7.2 C_DDS_BYP8.2 75.87,73.66 74.61,73.66 | OPAMP1.4 74.63,73.65 74.61,73.66 | 74.61,73.66 73.82,74.45 71.18,74.45 R_H1.1 | C_OUT4.1 46.99,74.61 46.51,74.14 46.04,74.14 v46.04,73.66 | 44.61,58.74 v45.72,58.74 | DDS1.9 51.44,67.31 51.28,67.15 50.17,67.15 49.85,67.47 v49.85,68.26 | LED2.C 64.57,59.06 v63.02,59.06 | v48.74,66.36 48.72,66.34 C_ISO2A1.2 C_ISO2B1.2 44.47,66.34 | R_ADJ4.2 46.04,74.07 v46.04,73.66
  Top 0.406: U$2.VOUT-@2 U$2.VOUT-@1 U$2.VOUT-@4 | U$2.VOUT-@2 U$2.VOUT-@3 U$2.VOUT-@6 | U$2.VOUT-@6 U$2.VOUT-@9 U$2.VOUT-@8 U$2.VOUT-@7 U$2.VOUT-@4 | U$2.VOUT-@4 U$2.VOUT-@5 | U$2.VOUT-@6 U$2.VOUT-@5 | U$2.VOUT-@5 U$2.VOUT-@2 | DIGITAL_ISO2.9 44.61,58.74 | 44.47,66.34 44.45,66.36 DIGITAL_ISO2.15 | C_ISO2A1.2 47.45,66.34
  Top 0.61: U$2.VOUT-@4 v44.45,73.66 v46.04,73.66
  Gnd 0.254: v78.74,73.66 67.79,74.77 | v45.72,58.74 46.51,58.74 | v49.85,68.26 49.85,68.74 | v63.02,59.06 62.55,59.06
  Gnd 0.406: 40.48,63.02 40.48,62.55
  other vias: 70.96,76.36
  pour Gnd: 39.69,78.26 39.69,57.79 67.94,57.79 67.94,66.52 54.45,66.52 54.45,68.26 79.53,68.26 79.53,78.26
IOUT  (via drill 0.4 pad 0.25)
  Top 0.254: OPAMP.3 73.83,92.09 v73.82,91.28 74.02,91.08 I_OUT.1
  Bottom 0.254: S2.2 62.87,91.28 v73.82,91.28
IOUT1  (via drill 0.4 pad 0.25)
  Top 0.254: OPAMP1.3 73.99,70.66 v73.98,69.85 74.18,69.64 I_OUT1.1
  Bottom 0.254: S4.2 63.02,69.85 v73.98,69.85
N$1
  Top 0.254: DDS.3 51.79,86.08 51.91,86.2 54.29,86.2 54.45,86.04 C_DDS4.2
N$2
  Top 0.254: 44.62,97.62 C_BYP.1 44.47,97.62 43.81,98.27 42.39,98.27 U$1.BYP
N$3
  Top 0.254: S1.2@2 S1.2@1 | U$1.RUN 34.13,96.36 33.02,95.25 25.88,95.25 25.32,94.69 S1.2@1 | 26.59,94.53 S1.2@1
N$6
  Top 0.254: R_LED.1 LED1.A
N$7
  Top 0.254: R_H2A.2 59,97.69 S2.6
N$8
  Top 0.254: CLOCK.4 59.73,84.14 60.33,84.14 60.64,83.82 61.49,83.82 R_SET.2
N$9
  Top 0.254: R_H2B.2 64.19,97.69 S2.4
N$10  (via drill 0.4 pad 0.25)
  Top 0.254: v32.38,93.5 32.7,93.82 U$1.BIAS
  Bottom 0.254: C_BIAS.1 v32.38,93.5
N$11  (via drill 0.4 pad 0.25)
  Top 0.254: 35.46,91.22 U$1.ADJ1 35.4,90.81 36.35,89.85 v36.51,89.85
  Bottom 0.254: R_ADJ1.2 36.51,91.22 v36.51,89.85
N$12
  Top 0.254: S2.1 64.19,92.61 R_H1B.2 R_H2B.1
N$13
  Top 0.254: U$1.ADJ2 44.45,96.2 R_ADJ2.1
N$14
  Top 0.254: 70.8,97.63 70.8,96.04
N$15
  Top 0.254: R_H2A.1 R_H1A.2 59,92.61 S2.3
N$16  (via drill 0.4 pad 0.25)
  Top 0.254: v32.54,72.07 32.86,72.39 U$2.BIAS
  Bottom 0.254: C_BIAS1.1 v32.54,72.07
N$17  (via drill 0.4 pad 0.25)
  Top 0.254: 35.62,69.79 U$2.ADJ1 35.56,69.37 36.51,68.42 v36.67,68.42
  Bottom 0.254: R_ADJ3.2 36.67,69.79 v36.67,68.42
N$18
  Top 0.254: U$2.ADJ2 44.61,74.77 R_ADJ4.1
N$19
  Top 0.254: 44.78,76.19 C_BYP1.1 44.62,76.19 43.97,76.84 42.54,76.84 U$2.BYP
N$20
  Top 0.254: DDS1.3 51.95,64.65 52.07,64.77 54.45,64.77 54.61,64.61 C_DDS2.2
N$21
  Top 0.254: CLOCK1.4 59.89,62.71 60.48,62.71 60.8,62.39 61.65,62.39 R_SET1.2
N$22
  Top 0.254: S4.1 64.35,71.18 R_H1B1.2 R_H2B1.1
N$23
  Top 0.254: S3.2@2 S3.2@1 | U$2.RUN 34.29,74.93 33.18,73.82 26.04,73.82 25.48,73.26 S3.2@1 | 26.75,73.1 S3.2@1
N$24
  Top 0.254: R_LED1.1 LED2.A
N$25
  Top 0.254: R_H2A1.2 59.16,76.26 S4.6
N$26
  Top 0.254: R_H2A1.1 R_H1A1.2 59.16,71.18 S4.3
N$27
  Top 0.254: R_H2B1.2 64.35,76.26 S4.4
N$28
  Top 0.254: 70.96,76.2 70.96,74.61
NEGA
  Top 0.254: R_H3.2 69.16,94.77 | 69.16,94.77 H_H4.1 | OPAMP.2 73.17,94.47 72.87,94.77 69.16,94.77
NEGA1
  Top 0.254: R_H1.2 69.32,73.34 | 69.32,73.34 H_H1.1 | OPAMP1.2 73.33,73.04 73.02,73.34 69.32,73.34
OP_OUTA
  Top 0.254: H_H4.2 70.96,93.03 71.12,93.19 | OPAMP.1 70.87,93.52 H_H4.2 | H_H4.2 70.8,93.45 70.8,92.39 70.48,92.08 68.26,92.08 67.94,92.39 67.94,98.58 67.47,99.06 62.23,99.06 61.59,98.43 S2.5
OP_OUTA1
  Top 0.254: H_H1.2 71.12,71.6 71.28,71.76 | OPAMP1.1 71.03,72.09 H_H1.2 | H_H1.2 70.96,72.02 70.96,70.96 70.64,70.64 68.42,70.64 68.1,70.96 68.1,77.15 67.63,77.63 62.39,77.63 61.75,76.99 S4.5
OUT_1  (1 unrouted)
  Top 0.61: X4.1 X5.1
OUT_2  (1 unrouted)
  Top 0.61: X4.2 87.94,9.87 X5.2
OUT_3  (1 unrouted)
  Top 0.61: X4.3 X5.3
OUT_4  (1 unrouted)
  Top 0.61: X4.4 X5.4
OUT_5  (1 unrouted)
  Top 0.61: X4.5 96.22,9.87 X5.5
OUT_6  (1 unrouted)
  Top 0.61: X4.6 X5.6
OUT_7  (1 unrouted)
  Top 0.61: X4.7 X5.7
OUT_8  (1 unrouted)
  Top 0.61: X4.8 X5.8
OUT_9  (1 unrouted)
  Top 0.61: X4.9 X5.9
OUT_10  (1 unrouted)
  Top 0.61: X4.10 X5.10
OUT_11  (1 unrouted)
  Top 0.61: X5.11 X4.11
OUT_12  (1 unrouted)
  Top 0.61: X4.12 X5.12
OUT_13  (1 unrouted)
  Top 0.61: X4.13 X5.13
OUT_14  (1 unrouted)
  Top 0.61: X4.14 X5.14
OUT_15  (1 unrouted)
  Top 0.61: X4.15 123.83,9.87 X5.15
OUT_16  (1 unrouted)
  Top 0.61: X4.16 X5.16
OUT_17  (1 unrouted)
  Top 0.61: X4.17 X5.17
OUT_18  (1 unrouted)
  Top 0.61: X4.18 132.11,9.87 X5.18
OUT_19  (1 unrouted)
  Top 0.61: X4.19 X5.19
OUT_20  (2 unrouted)
  Top 0.61: X4.20 86.54,6.69 86.36,6.51
OUT_21  (1 unrouted)
  Top 0.61: X4.21 X5.21
OUT_22  (1 unrouted)
  Top 0.61: X4.22 92.08,7.33 X5.22
OUT_23  (1 unrouted)
  Top 0.61: X4.23 X5.23
OUT_24  (1 unrouted)
  Top 0.61: X4.24 X5.24
OUT_25  (1 unrouted)
  Top 0.61: X4.25 X5.25
OUT_26  (1 unrouted)
  Top 0.61: X4.26 X5.26
OUT_27  (1 unrouted)
  Top 0.61: X4.27 X5.27
OUT_28  (1 unrouted)
  Top 0.61: X4.28 X5.28
OUT_29  (1 unrouted)
  Top 0.61: X4.29 X5.29
OUT_30  (1 unrouted)
  Top 0.61: X4.30 X5.30
OUT_31  (1 unrouted)
  Top 0.61: X4.31 X5.31
OUT_32  (1 unrouted)
  Top 0.61: X4.32 119.69,7.33 X5.32
OUT_33
  Top 0.61: X4.33 X5.33
OUT_34
  Top 0.61: X4.34 X5.34
OUT_35
  Top 0.61: X4.35 127.97,7.33 X5.35
OUT_36
  Top 0.61: X4.36 X5.36
OUT_37
  Top 0.61: X4.37 X5.37
SCLK
  Top 0.254: DIGITAL_ISO1.12 46.35,83.98 48.26,85.88 49.05,85.88 50.8,87.63 51.75,87.63 52.3,88.18 DDS.7
SCLK1
  Top 0.254: DIGITAL_ISO2.12 46.51,62.55 48.42,64.45 49.21,64.45 50.96,66.2 51.91,66.2 52.46,66.75 DDS1.7
SCLK_IN  (via drill 0.4 pad 0.25)
  Top 0.254: DIGITAL_ISO1.5 26.99,83.98 24.45,86.52 v14.76,86.52
  Bottom 0.254: X2.2 14.01,92.82 14.76,92.08 v14.76,86.52 14.76,86.2 14.76,7.46
SCLK_IN1
  Top 0.254: DIGITAL_ISO2.5 27.15,62.55 24.61,65.09 14.92,65.09
SDATA  (via drill 0.3 pad 0.25, 0.4 pad 0.25)
  Top 0.254: DIGITAL_ISO1.13 v45.72,85.25 | v52.86,87.31 52.78,87.39 DDS.6
  Bottom 0.254: v45.72,85.25 46.35,85.25 47.31,86.2 49.85,86.2 50.48,86.84 52.39,86.84 v52.86,87.31
SDATA1  (via drill 0.3 pad 0.25, 0.4 pad 0.25)
  Top 0.254: DIGITAL_ISO2.13 v45.88,63.82 | v53.02,65.88 52.94,65.96 DDS1.6
  Bottom 0.254: v45.88,63.82 46.51,63.82 47.47,64.77 50.01,64.77 50.64,65.41 52.55,65.41 v53.02,65.88
SDATA_IN  (via drill 0.4 pad 0.25)
  Top 0.254: DIGITAL_ISO1.4 26.99,85.25 24.45,87.79 v15.72,87.79
  Bottom 0.254: X2.3 14.6,95.57 15.72,94.46 15.72,88.9 v15.72,87.79 15.72,7.14
SDATA_IN1
  Top 0.254: DIGITAL_ISO2.4 27.15,63.82 24.61,66.36 15.88,66.36
SW_DIN
  Top 0.254: X2.5 11.2,101.12 5.71,101.12 4.13,99.54 4.13,71.76 5.02,70.87 U1.3
SW_SCLK
  Top 0.254: X2.1 11.04,89.85 6.83,89.85 5.71,88.74 5.71,72.23 5.78,72.16 U1.1
SW_~RESET
  Top 0.254: U1.23 12.76,71.5 13.34,72.07 13.34,77.31 13.34,77.79 13.34,96.04 12.38,97 8.79,97 X2.8
SW_~SYNC
  Top 0.254: X2.7 8.83,94.3 12.22,94.3 12.7,93.82 12.7,88.58 12.06,87.95 7.14,87.95 6.51,87.31 6.51,77.47 7.78,76.2 11.11,76.2 12.03,75.29 U1.24
V_SINE
  Top 0.254: R_H1B.1 R_H1A.1 55.4,90.91 | DDS.10 50.8,90.65 51.06,90.91 55.4,90.91 | TP_VSIN.TP 55.4,96.68 55.4,90.91
V_SINE1
  Top 0.254: R_H1B1.1 R_H1A1.1 55.56,69.48 | DDS1.10 50.96,69.22 51.22,69.48 55.56,69.48 | TP_VSIN1.TP 55.56,75.25 55.56,69.48
VDD  (via drill 0.4 pad 0.25)
  Top 0.254: U$1.VIN@2 33.34,97.63 33.02,97.31 v33.02,96.52 | S1.3 20.8,82.49 v20.8,80.33
  Top 0.406: U$1.VIN@2 U$1.VIN@4 U$1.VIN@3 U$1.VIN@1
  Vdd 0.254: v33.02,96.52 31.91,96.52 | v20.8,80.33 20.96,79.69 20.96,79.06
  Bottom 0.254: C_IN.1 v33.02,96.52
  pour Vdd: 38.42,113.19 16.99,113.98 16.99,66.2 38.42,65.41
VDD1  (via drill 0.4 pad 0.25)  (1 unrouted)
  Top 0.254: U$2.VIN@2 33.5,76.2 33.18,75.88 v33.18,75.09 | S3.3 20.96,61.06 v20.96,58.9
  Top 0.406: U$2.VIN@2 U$2.VIN@4 U$2.VIN@3 U$2.VIN@1
  Vdd 0.254: v33.18,75.09 32.07,75.09 | v20.96,58.9 21.11,58.26 21.11,57.63
  Bottom 0.254: C_IN1.1 v33.18,75.09
VDD_CS_ANA  (via drill 0.4 pad 0.25)
  Top 0.254: OPAMP.8 72.54,96.85 72.87,96.52 75.58,96.52 | 75.58,96.52 C_DDS_BYP4.1 C_DDS_BYP3.1 | 75.58,96.52 75.72,96.52 v75.72,97.95 | U$1.VOUT2@1 44.91,98.9 C_BYP.2 44.94,98.9 44.95,98.9 46.51,98.9 46.83,98.58 C_OUT2.2 | C_OUT2.2 46.83,98.9 | v48.74,98.9 48.42,98.58 C_OUT2.2
  Top 0.406: U$1.VOUT2@4 U$1.VOUT2@3 U$1.VOUT2@2 U$1.VOUT2@1
  Vdd 0.254: v48.74,98.9 49.05,98.9
  pour Vdd: 39.53,93.82 39.53,99.7 79.38,99.7 79.38,89.69 55.09,89.69 55.09,93.82
VDD_CS_ANA1  (via drill 0.4 pad 0.25)
  Top 0.254: OPAMP1.8 72.69,75.42 73.02,75.09 75.74,75.09 | 75.74,75.09 C_DDS_BYP8.1 C_DDS_BYP7.1 | 75.74,75.09 75.88,75.09 v75.88,76.52 | U$2.VOUT2@1 45.07,77.47 C_BYP1.2 45.1,77.47 46.67,77.47 46.99,77.15 C_OUT4.2 | C_OUT4.2 46.99,77.47 | v48.9,77.47 48.58,77.15 C_OUT4.2
  Top 0.406: U$2.VOUT2@4 U$2.VOUT2@3 U$2.VOUT2@2 U$2.VOUT2@1
  Vdd 0.254: v48.9,77.47 49.21,77.47
  pour Vdd: 39.69,72.39 39.69,78.26 79.53,78.26 79.53,68.26 55.25,68.26 55.25,72.39
VDD_CS_DIG  (via drill 0.4 pad 0.25, 0.5)
  Top 0.254: C_OUT1.2 45.24,91.28 v44.29,91.28 | DDS.2 51.28,83.68 C_DDS_BYP1.1 | C_DDS_BYP1.1 C_DDS_BYP2.1 51.1,80.66 v51.12,80.65 | v49.21,81.76 C_DDS3.1 50.93,83.33 C_DDS_BYP1.1 | DIGITAL_ISO1.16 43.77,89.07 C_ISO2B.1 | C_ISO2B.1 C_ISO2A.1 | C_ISO2B.1 45.58,89.06 47.94,89.06 v48.26,89.38 | R_LED.2 64.44,85.41 v62.87,85.41
  Top 0.406: U$1.VOUT1@5 U$1.VOUT1@6 U$1.VOUT1@3 U$1.VOUT1@2 | U$1.VOUT1@4 U$1.VOUT1@5 | U$1.VOUT1@2 U$1.VOUT1@1 U$1.VOUT1@4 | U$1.VOUT1@5 U$1.VOUT1@2 | U$1.VOUT1@4 v44.29,91.28 | C_CLK_BYP.1 56.37,83.99 | CLOCK.6 57.7,83.99 56.37,83.99 | 56.37,83.99 56.36,83.98 v56.36,85.57
  Vdd 0.254: v49.21,81.76 40.96,85.09 | v51.12,80.65 42.86,84.3 | v48.26,89.38 48.26,90.01 | v62.87,85.41 61.91,85.41
  pour Vdd: 39.53,93.03 39.53,79.22 67.79,79.22 67.79,87.95 54.29,87.95 54.29,93.03
VDD_CS_DIG1  (via drill 0.4 pad 0.25, 0.5)
  Top 0.254: C_OUT3.2 45.4,69.85 v44.45,69.85 | DDS1.2 51.44,62.25 C_DDS_BYP5.1 | C_DDS_BYP5.1 C_DDS_BYP6.1 51.26,59.23 v51.28,59.21 | v49.37,60.33 C_DDS1.1 51.09,61.9 C_DDS_BYP5.1 | DIGITAL_ISO2.16 43.93,67.64 C_ISO2B1.1 | C_ISO2B1.1 C_ISO2A1.1 | C_ISO2B1.1 45.74,67.63 48.1,67.63 v48.42,67.95 | R_LED1.2 64.6,63.98 v63.02,63.98
  Top 0.406: U$2.VOUT1@5 U$2.VOUT1@6 U$2.VOUT1@3 U$2.VOUT1@2 | U$2.VOUT1@4 U$2.VOUT1@5 | U$2.VOUT1@2 U$2.VOUT1@1 U$2.VOUT1@4 | U$2.VOUT1@5 U$2.VOUT1@2 | U$2.VOUT1@4 v44.45,69.85 | C_CLK_BYP1.1 56.53,62.56 | CLOCK1.6 57.86,62.56 56.53,62.56 | 56.53,62.56 56.51,62.55 v56.51,64.14
  Vdd 0.254: v49.37,60.33 41.12,63.66 | v51.28,59.21 43.02,62.87 | v48.42,67.95 48.42,68.58 | v63.02,63.98 62.07,63.98
  pour Vdd: 39.69,71.6 39.69,57.79 67.94,57.79 67.94,66.52 54.45,66.52 54.45,71.6
(copper drawn outside any net)
  shapes: Top area x10

## Text on the board
tPlace: PWR GND | GND PWR | On/Off | GND Vsin | I+ GND | 60uA | 200uA | Amplitude | On/Off | GND Vsin | I+ GND | 60uA | 200uA | Amplitude